# Altium PCB Ventilator.PcbDoc (part 2 of 2)
Units mm, origin at the board's own origin, x right, y up, seen from the top; angles counter-clockwise.
Board outline 121 x 71 mm, 4 copper layers (Top Layer, Int1 (GND), Int2 (PWR), Bottom Layer), stack 1.454 mm thick; 107 components, 73 nets, 431 pads, 141 vias.
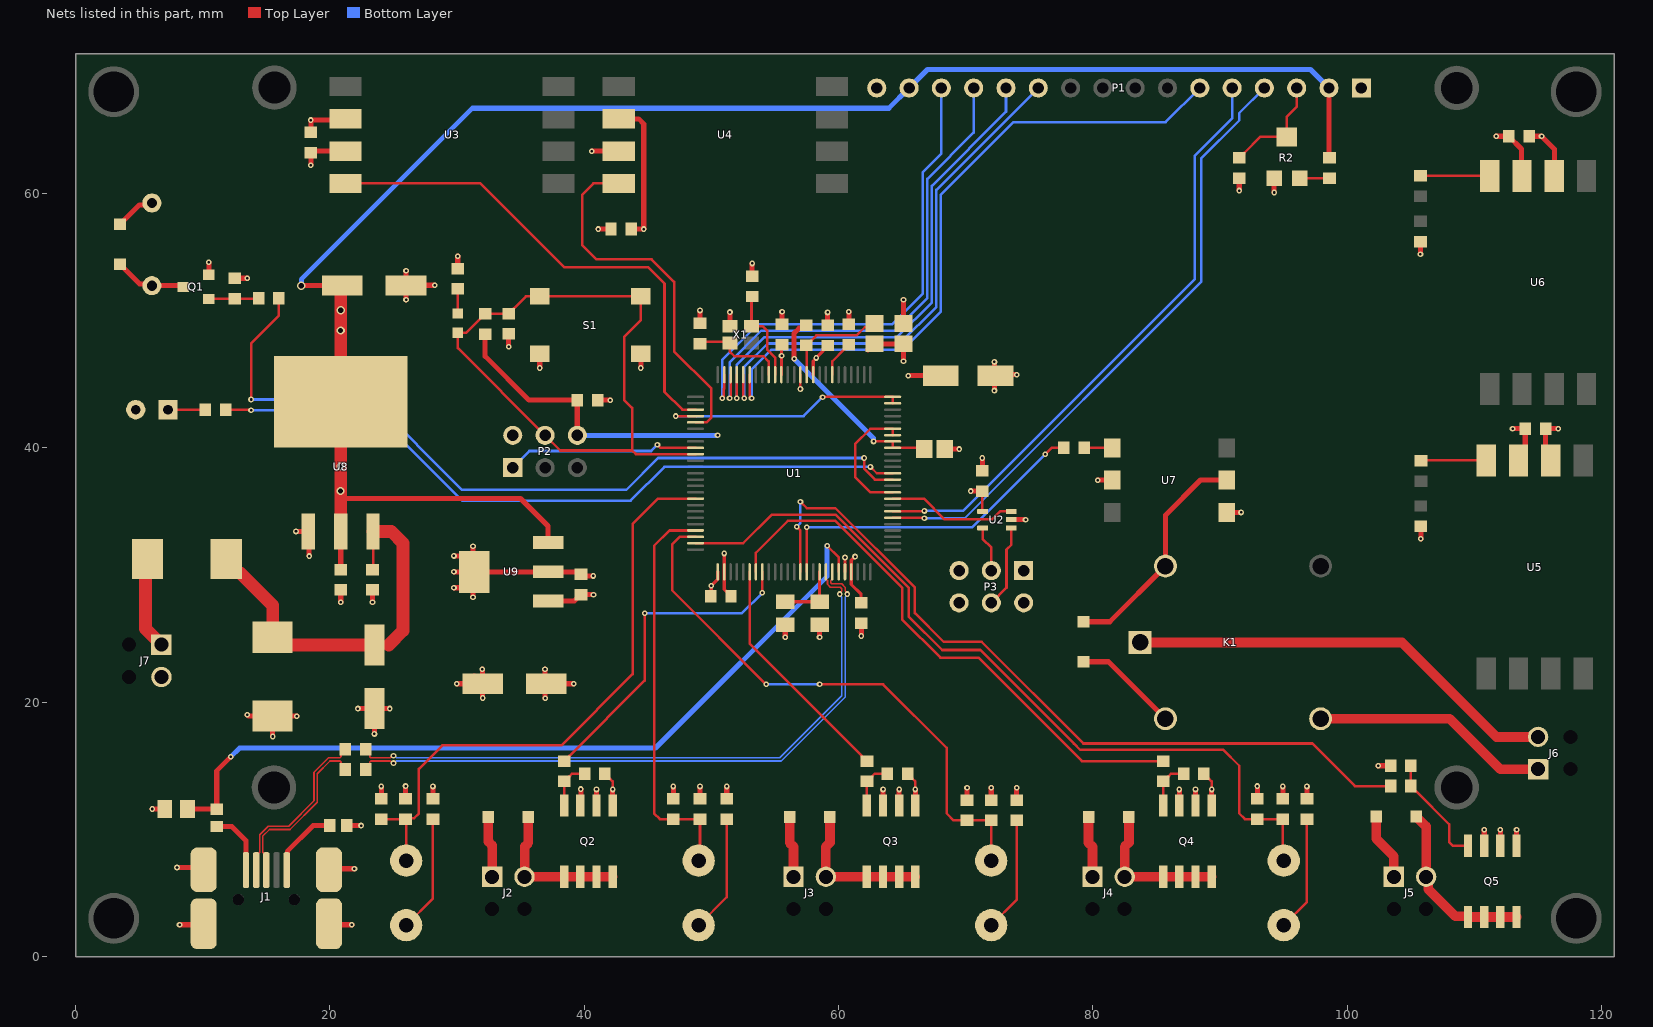
[diagram p4: the nets of this part, all layers, seen from the top]

## Via types
v1: diameter 0.45, hole 0.2, Top Layer to Bottom Layer, 136 vias
v2: diameter 0.66, hole 0.406, Top Layer to Bottom Layer, 5 vias

## Nets (pads, with @x,y where several pads share a name; then routed paths per layer and width w, separated by ;. In a path a pad name is that pad's centre, name@x,y a point inside that pad or via, vN(x,y) a via of type N, cw(c..) or ccw(c..) an arc to the next point about the centre after c; other vN are vias at no path point) (continued)
+3V3: C2.1 C4.1 C9.1 C12.1 C15.1 C25.1 C26.1 D1.2 FB3.1 LS1.1 P3.1 P3.2 R6.2 R10.2 R13.2 R18.2 R27.1 U2.4 U3.2 U4.2 U5.2 U6.2 U9.2 U9.4 | length 60.2
  Top Layer w0.2: C2.1@71.3,36.6 71.3,35.025 U2.4@71.325,35
  Top Layer w0.4: D1.2@3.5,57.575 3.525,57.575 3.775,57.825 3.775,57.85 5.033,59.108 5.858,59.108 LS1.1@6,59.25 ; C4.1@18.5,64.8 v1(18.5,65.775) 21.125,65.775 U3.2@21.22,65.87 ; R6.2@28.1,12.4 v1(28.1,13.375) ; v1(29.75,29) 30.35,29 U9.4@31.25,29.9 ; v1(29.75,30.25) U9.4@31.25,30.25 ; v1(29.75,31.5) 30.35,31.5 U9.4@31.25,30.6 ; v1(29.977,21.445) C26.1@32.008,21.445 ; R27.1@30.051,53.942 R27.1@30.051,54.092 v1(30.051,55.067) ; v1(31.25,28.25) U9.4@31.25,29.9 ; v1(31.25,32.25) U9.4@31.25,30.6 ; C26.1@31.35,22.045 31.928,21.467 C26.1@31.986,21.467 ; U9.4@31.35,30.25 U9.2@37.15,30.25 39.55,30.25 C25.1@39.75,30.05 ; v1(31.986,22.585) C26.1@31.986,21.467 ; v1(32.008,20.326) C26.1@32.008,21.445 ; C25.1@39.752,29.927 v1(40.715,29.927) ; U4.2@42.72,65.87 42.725,65.865 44.275,65.865 44.675,65.465 v1(44.675,57.2) C9.1@43.7,57.2 ; R10.2@51.2,12.25 R10.2@51.2,12.4 v1(51.2,13.375) ; FB3.1@65.103,49.774 v1(65.103,51.641) ; v1(70.4,36.6) C2.1@71.3,36.6 ; R13.2@74,12.15 R13.2@74,12.3 v1(74,13.275) ; R18.2@96.827,12.25 R18.2@96.827,12.4 v1(96.827,13.375) ; C15.1@114.3,64.5 v1(115.275,64.5) 116.3,63.475 116.3,61.41 U6.2@116.27,61.38 ; U5.2@115.952,39.058 115.592,39.418 C12.1@115.592,41.503 v1(116.592,41.503) ; U9.4@31.25,29.9 U9.4@31.25,30.25 ; U9.4@31.25,30.25 U9.4@31.25,30.6 ; C26.1@31.986,21.467 C26.1@32.008,21.445
+5V: C23.1 C24.1 D3.2 D4.2 D5.2 D6.2 J2.1 J3.1 J4.1 J5.1 P1.2 P1.15 R1.1 U8.2 U8.4 U9.3 | length 158
  Top Layer w0.4: v2(17.75,52.75) C24.1@20.849,52.75 ; C23.1@20.849,30.427 U8.2@20.849,33.427 ; 20.849,36.019 34.981,36.019 37.15,33.85 U9.3@37.15,32.55 ; P1.2@98.56,68.295 98.56,62.84 R1.1@98.6,62.8
  Top Layer w0.762: D3.2@32.452,10.97 32.452,9.045 32.757,8.74 J2.1@32.757,6.27 ; D4.2@56.152,10.97 56.152,8.945 56.457,8.64 J3.1@56.457,6.27 ; D5.2@79.652,10.97 79.652,8.945 79.957,8.64 J4.1@79.957,6.27 ; D6.2@102.263,11.001 102.263,9.274 103.657,7.88 J5.1@103.657,6.27
  Top Layer w1: U8.2@20.849,33.427 20.849,36.019 U8.4@20.849,43.627 C24.1@20.849,52.75
  Bottom Layer w0.4: v2(17.75,52.75) 17.75,53.25 31.2,66.7 63.945,66.7 P1.15@65.54,68.295 66.995,69.75 97.105,69.75 P1.2@98.56,68.295
  other v2: 20.835,36.605 20.835,38.537 20.839,49.224 20.851,50.816
+12V: D8.2 K1.2 | length 8.3
  Top Layer w0.4: D8.2@79.25,23.175 81.225,23.175 K1.2@85.7,18.7
AGND: C27.2 FB5.1 U1.17 U1.18 | length 16.8
  Top Layer w0.2: v1(62.75,40.5) U1.18@64.25,40.5 U1.17@64.25,40 FB5.1@66.65,40
  Top Layer w0.4: v1(56.5,47) 56.5,49 56.9,49.4 57.2,49.4 C27.2@57.45,49.65 ; FB5.1@66.65,40 FB5.1@66.75,39.9
  Bottom Layer w0.4: v1(56.5,47) 62.75,40.75 v1(62.75,40.5)
ALARM: R5.1 U1.13 | length 56.7
  Top Layer w0.2: R5.1@11.8,43 13.751,43 v1(13.8,42.951) ; v1(62.5,38.5) 63,38 U1.13@64.25,38
  Bottom Layer w0.2: v1(13.8,42.951) 23.3,42.951 30.4,35.851 43.651,35.851 46.3,38.5 v1(62.5,38.5)
BKGD: P2.1 U1.59 | length 15.2
  Top Layer w0.2: v1(45.75,40.25) 46,40 U1.59@48.75,40
  Bottom Layer w0.2: P2.1@34.376,38.444 35.682,39.75 45.25,39.75 v1(45.75,40.25)
BUTTON1: C5.1 R8.2 SW1.1 U1.67 | length 47.4
  Top Layer w0.2: R8.2@24.046,10.8 C5.1@25.946,10.8 ; SW1.1@26,7.54 26,10.746 C5.1@25.946,10.8 ; U1.67@48.75,36 45.8,36 43.8,34 43.8,22.2 38.2,16.6 28.85,16.6 27,14.75 27,11.25 26.629,10.879 26.025,10.879 C5.1@25.946,10.8
BUTTON2: C8.1 R11.2 SW2.1 U1.72 | length 31.9
  Top Layer w0.2: U1.72@48.75,33.5 46.7,33.5 45.5,32.3 45.5,11.25 45.95,10.8 C8.1@47,10.8 R11.2@49.1,10.8 49.1,7.64 SW2.1@49,7.54
BUTTON3: C10.1 R15.2 SW3.1 U1.73 | length 44.5
  Top Layer w0.2: U1.73@48.75,33 47.5,33 46.9,32.4 46.9,28.8 v1(54.3,21.4) ; v1(58.5,21.4) 63.5,21.4 68.5,16.4 68.5,11.25 69.05,10.7 C10.1@70.1,10.7 R15.2@72,10.7 SW3.1@72,7.54
  Bottom Layer w0.2: v1(54.3,21.4) v1(58.5,21.4)
BUTTON4: C11.1 R20.2 SW4.1 U1.74 | length 63.8
  Top Layer w0.2: U1.74@48.75,32.5 52.5,32.5 54.75,34.75 59.75,34.75 65.5,29 65.5,26.75 68.146,24.104 71.146,24.104 78.5,16.75 79,16.25 90.25,16.25 91.5,15 91.5,11.25 91.95,10.8 C11.1@92.927,10.8 R20.2@94.927,10.8 94.927,7.613 SW4.1@95,7.54
BUZZ: R3.1 U1.12 | length 64.5
  Top Layer w0.2: v1(13.8,43.8) 13.8,48.2 15.992,50.392 R3.1@15.992,51.768 ; v1(62,39.2) 62,38.361 62.861,37.5 63.675,37.5 U1.12@64.25,37.5
  Bottom Layer w0.2: v1(13.8,43.8) 23.3,43.8 30.4,36.7 43.3,36.7 45.8,39.2 v1(62,39.2)
COMPR: R28.1 U1.90 | length 26.3
  Top Layer w0.2: U1.90@57.5,30.25 v1(57.5,33.75) ; v1(76.25,39.5) 76.75,40 R28.1@77.7,40
  Bottom Layer w0.2: v1(57.5,33.75) 70.5,33.75 v1(76.25,39.5)
DB4: P1.11 U1.46 | length 41.9
  Top Layer w0.2: U1.46@52.5,45.75 52.5,43.971 v1(52.577,43.894)
  Bottom Layer w0.2: v1(52.577,43.894) 52.577,46.354 54.427,48.204 64.803,48.204 67.688,51.088 67.688,60.283 P1.11@75.7,68.295
DB5: P1.12 U1.47 | length 41.1
  Top Layer w0.2: v1(52,43.894) U1.47@52,45.75
  Bottom Layer w0.2: v1(52,43.894) 52,46.539 54.165,48.704 64.596,48.704 67.334,51.442 67.334,60.603 73.16,66.429 P1.12@73.16,68.295
DB6: P1.13 U1.48 | length 40.4
  Top Layer w0.2: v1(51.423,43.894) 51.5,43.971 U1.48@51.5,45.75
  Bottom Layer w0.2: v1(51.423,43.894) 51.423,46.724 53.903,49.204 64.389,49.204 66.981,51.795 66.981,61.139 70.62,64.778 P1.13@70.62,68.295
DB7: P1.14 U1.49 | length 39.6
  Top Layer w0.2: v1(50.846,43.894) 50.971,44.019 50.971,44.627 51,44.656 U1.49@51,45.75
  Bottom Layer w0.2: v1(50.846,43.894) 50.846,46.909 53.641,49.704 64.182,49.704 66.627,52.149 66.627,61.674 68.08,63.127 P1.14@68.08,68.295
DPS: U1.10 U1.19 U1.20 | length 10
  Top Layer w0.2: U1.10@64.25,36.5 63.675,36.5 62.5,36.5 61.3,37.7 61.3,40.3 62.5,41.5 U1.20@64.25,41.5 U1.19@64.25,41
DPS2: U1.24 U1.25 U1.54 | length 19.7
  Top Layer w0.2: v1(47.196,42.497) 47.199,42.5 U1.54@48.75,42.5 ; v1(58.735,43.985) 58.771,44.021 63.654,44.021 63.675,44 U1.25@64.25,44 U1.24@64.25,43.5
  Bottom Layer w0.2: v1(47.196,42.497) 57.247,42.497 v1(58.735,43.985)
E: P1.6 U1.45 | length 54
  Top Layer w0.2: U1.45@53,45.75 53,44.656 53.029,44.627 53.029,44.019 v1(53.154,43.894)
  Bottom Layer w0.2: v1(53.154,43.894) 53.154,46.169 54.689,47.704 65.01,47.704 68.041,50.735 68.041,59.913 73.739,65.611 85.716,65.611 P1.6@88.4,68.295
GAS1: R12.1 U1.81 | length 18.7
  Top Layer w0.2: U1.81@53,30.25 53,24.597 61.827,15.77 61.827,15.72 62.177,15.37 R12.1@62.227,15.37
GAS2: R17.1 U1.82 | length 43.8
  Top Layer w0.2: U1.82@53.5,30.25 53.5,31.75 56,34.25 59.75,34.25 65,29 65,26.5 68,23.5 71,23.5 79.13,15.37 R17.1@85.527,15.37
GND: C1.2 C2.2 C3.2 C4.2 C5.2 C6.2 C7.2 C8.2 C9.2 C10.2 C11.2 C12.2 C13.2 C14.2 C15.2 C16.2 C17.2 C18.2 C19.2 C20.2 C21.2 C22.2 C23.2 C24.2 C25.2 C26.2 C28.1 C29.1 C30.1 D2.2 D10.1 FB2.2 FB5.2 J1.6 J1.7 J1.8 J1.9 J7.2 P1.1 P1.16 P2.2 P3.5 P3.6 Q1.2 Q2.1 Q2.2 Q2.3 Q3.1 Q3.2 Q3.3 Q4.1 Q4.2 Q4.3 Q5.1 Q5.2 Q5.3 R2.1 R4.2 R8.1 R9.2 R11.1 R14.2 R15.1 R19.2 R20.1 R21.1 R24.2 R25.1 S1.1 S1.2 U1.37 U1.76 U1.96 U2.2 U3.3 U4.3 U5.3 U6.3 U7.2 U7.4 U8.1 U9.1 X1.2 | length 115.9
  Top Layer w0.2: R9.2@41.627,14.37 41.627,14.32 41.977,13.97 42.027,13.97 42.232,13.765 v1(42.232,13.135) ; v1(57,44.625) U1.37@57,45.75 ; U1.96@60.5,30.25 v1(60.5,31.375) ; R14.2@65.427,14.37 65.427,14.32 65.777,13.97 65.827,13.97 66.032,13.765 v1(66.032,13.135) ; R19.2@88.727,14.37 88.727,14.32 89.077,13.97 89.127,13.97 89.332,13.765 v1(89.332,13.135)
  Top Layer w0.254: C17.2@49.936,28.329 49.99,28.383 v1(49.99,29.162) 50.5,29.672 U1.76@50.5,30.25
  Top Layer w0.4: v1(6.025,11.6) C30.1@7,11.6 ; v1(7.975,7) J1.6@10.075,7 ; v1(8.175,2.5) J1.7@10.075,2.5 ; Q1.2@10.477,53.607 v1(10.477,54.582) ; R4.2@12.525,53.33 v1(13.5,53.33) ; v1(13.5,19) 13.514,19 13.614,18.9 D10.1@15.5,18.9 ; v1(15.5,17.3) D10.1@15.5,18.9 ; v1(17.334,33.427) U8.1@18.309,33.427 ; v1(17.4,18.9) D10.1@15.5,18.9 ; v1(18.367,31.489) U8.1@18.367,33.427 ; v1(18.5,62.225) C4.2@18.5,63.2 18.63,63.33 U3.3@21.22,63.33 ; J1.9@19.925,2.5 v1(21.725,2.5) ; J1.8@20.2,6.9 v1(21.925,6.9) ; v1(20.849,27.852) C23.2@20.849,28.827 ; FB2.2@21.325,10.3 v1(22.45,10.3) ; v1(22.2,19.5) C21.2@23.5,19.5 ; v1(23.349,27.852) C22.2@23.349,28.827 ; v1(23.5,17.5) C21.2@23.5,19.5 ; R8.1@24.046,12.4 v1(24.046,13.375) ; v1(24.7,19.5) C21.2@23.5,19.5 ; C5.2@25.946,12.275 v1(25.946,13.4) ; C24.2@25.98,52.758 25.987,52.751 v1(25.987,51.641) ; v1(25.987,53.927) 25.987,52.791 25.98,52.784 v1(28.232,52.784) ; v1(34.057,47.954) C16.2@34.057,48.954 C16.2@34.057,49.079 ; v1(36.499,46.277) S1.2@36.499,47.402 ; v1(36.913,22.593) 36.913,21.54 C26.2@37.008,21.445 ; v1(36.921,20.302) 36.921,21.358 C26.2@37.008,21.445 ; U9.1@37.15,27.95 39.216,27.95 39.45,28.184 39.45,28.2 39.7,28.45 C25.2@39.75,28.45 v1(40.725,28.45) ; v1(39.166,21.445) C26.2@37.008,21.445 ; Q2.3@39.692,11.87 39.727,11.905 v1(39.727,13.17) ; v1(40.592,63.325) 40.597,63.33 U4.3@42.72,63.33 ; Q2.2@40.962,11.87 v1(40.962,13.135) ; C3.2@41.05,43.75 v1(42.05,43.75) ; v1(41.1,57.2) C9.2@42.1,57.2 C9.2@42.225,57.2 ; Q2.1@42.232,11.87 v1(42.232,13.135) ; v1(44.449,46.277) S1.1@44.449,47.402 ; C8.2@47,12.4 v1(47,13.375) ; R11.1@49.1,12.4 v1(49.1,13.375) ; C13.2@49.1,49.675 C13.2@49.1,49.8 v1(49.1,50.8) ; X1.2@51.45,49.55 v1(51.45,50.675) ; C14.2@53.2,53.375 C14.2@53.2,53.5 v1(53.2,54.5) ; C19.2@55.55,49.575 C19.2@55.55,49.7 v1(55.55,50.7) ; v1(55.8,25.1) C28.1@55.8,26.1 ; v1(58.5,25.1) C29.1@58.5,26.1 ; C6.2@59.134,49.647 v1(59.134,50.647) ; C7.2@60.8,49.575 C7.2@60.8,49.7 v1(60.8,50.7) ; v1(61.789,25.203) C18.2@61.789,26.203 C18.2@61.789,26.328 ; Q3.3@63.492,11.87 v1(63.492,13.135) ; Q3.2@64.762,11.87 v1(64.762,13.135) ; Q3.1@66.032,11.87 v1(66.032,13.135) ; FB5.2@68.35,39.9 v1(69.475,39.9) ; C10.2@70.1,12.3 v1(70.1,13.275) ; C2.2@71.3,38.2 v1(71.3,39.2) ; R15.1@72,12.3 v1(72,13.275) ; v1(72.25,44.5) 72.25,45.589 C20.2@72.333,45.672 ; v1(72.25,46.75) 72.25,45.627 C20.2@72.28,45.598 ; C20.2@72.333,45.75 v1(74,45.75) ; U2.2@73.575,34.35 v1(74.7,34.35) ; v1(80.375,37.46) U7.2@81.5,37.46 ; Q4.3@86.792,11.87 v1(86.792,13.135) ; Q4.2@88.062,11.87 v1(88.062,13.135) ; Q4.1@89.332,11.87 v1(89.332,13.135) ; U7.4@90.52,34.92 v1(91.645,34.92) ; v1(91.5,60.225) C1.2@91.5,61.2 ; C11.2@92.927,12.398 v1(92.927,13.4) ; v1(94.25,60.075) R2.1@94.25,61.2 ; R20.1@94.927,12.25 R20.1@94.927,12.4 v1(94.927,13.375) ; v1(102.425,15) R24.2@103.4,15 ; v1(105.75,55.225) R25.1@105.75,56.2 R25.1@105.75,56.35 ; v1(105.783,32.852) R21.1@105.783,33.827 R21.1@105.783,33.977 ; Q5.3@110.765,8.7 v1(110.765,9.965) ; v1(111.7,64.5) C15.2@112.7,64.5 ; Q5.2@112.035,8.7 v1(112.035,9.965) ; C15.2@112.825,64.5 C15.2@112.7,64.5 ; v1(112.992,41.503) C12.2@113.992,41.503 113.992,39.762 U5.3@113.35,39.12 ; Q5.1@113.305,8.7 v1(113.305,9.965) ; U6.3@113.73,61.38 113.7,61.41 113.7,63.5 C15.2@112.7,64.5
MCU3V3: C3.1 C6.1 C17.1 C18.1 C19.1 C20.1 FB3.2 FB4.2 P2.6 R26.2 U1.35 U1.40 U1.77 U1.97 | length 43.5
  Top Layer w0.254: v1@51.006,31.702 v1(51,31.696) U1.77@51,30.25 51,28.865 51.163,28.702 51.213,28.702 51.536,28.379 C17.1@51.536,28.329 ; U1.40@55.5,45.75 55.5,48.05 C19.1@55.55,48.1 ; U1.35@58,45.75 58,46.824 v1(58.245,47.069) 58.761,47.585 58.761,47.724 59.084,48.047 C6.1@59.134,48.047 ; v1(61.293,31.448) 61,31.155 U1.97@61,30.25 61,29.25 61.765,28.485 61.765,27.827 C18.1@61.789,27.803 ; C18.1@61.918,27.932 C18.1@62.05,27.8
  Top Layer w0.4: R26.2@32.21,48.936 32.21,47.196 35.656,43.75 C3.1@39.45,43.75 39.45,40.99 P2.6@39.456,40.984 ; FB4.2@62.317,47.684 FB4.2@62.317,47.724 ; FB4.2@62.817,48.174 FB3.2@65.103,48.174 v1(65.103,46.815) ; v1(65.484,45.672) C20.1@68.033,45.672
  Bottom Layer w0.4: P2.6@39.456,40.984 v1(50.484,40.984)
  other v1: 55.514,47.232
MCU_RESET: C16.1 D7.2 P2.4 R26.1 S1.3 S1.4 U1.60 | length 52
  Top Layer w0.2: C16.1@34.057,50.554 34.107,50.554 34.457,50.904 34.457,50.954 35.405,51.902 S1.4@36.499,51.902 S1.3@44.449,51.902 44.449,50.037 43.132,48.72 43.132,43.767 43.767,43.132 43.767,39.79 ; C16.1@34.107,50.551 32.225,50.551 R26.1@32.21,50.536 32.16,50.536 31.81,50.186 31.81,50.136 30.728,49.054 D7.2@30.057,49.054 30.057,47.843 P2.4@36.916,40.984 38.11,39.79 43.767,39.79 ; U1.60@48.75,39.5 44.057,39.5 43.767,39.79
NetC7_1: C7.1 U1.32 | length 2.9
  Top Layer w0.2: U1.32@59.5,45.75 59.5,46.8 C7.1@60.427,47.727
  Top Layer w0.254: C7.1@60.427,47.727 60.427,47.777 60.75,48.1 C7.1@60.8,48.1
NetC13_1: C13.1 U1.42 X1.3 | length 7.5
  Top Layer w0.2: C13.1@49.1,48.325 51.375,48.325 X1.3@51.45,48.25 51.45,47.55 51.8,47.2 54.1,47.2 54.5,46.8 54.5,46.325 U1.42@54.5,45.75
NetC14_1: C14.1 U1.41 X1.1 | length 7.6
  Top Layer w0.2: C14.1@53.2,52.025 53.15,51.975 X1.1@53.15,49.55 54.05,49.55 54.4,49.2 54.4,47.7 55,47.1 U1.41@55,45.75
NetC21_1: C21.1 C22.1 D9.2 D10.2 U8.3 | length 31.1
  Top Layer w0.2: C22.1@23.349,30.427 23.389,30.467 U8.3@23.389,33.427
  Top Layer w1: D9.2@11.85,31.25 11.85,30.9 12.575,30.175 12.925,30.175 15.5,27.6 D10.2@15.5,25.1 D10.2@16.1,24.5 ; D10.2@15.575,25.175 16.25,24.5 C21.1@23.5,24.5 ; U8.3@23.389,33.427 23.394,33.422 24.828,33.422 25.75,32.5 25.75,25.625 24.625,24.5
NetC27_1: C27.1 FB4.1 U1.36 | length 8.4
  Top Layer w0.2: U1.36@57.5,45.75 57.5,48 C27.1@57.45,48.05 57.5,48.05 57.85,48.4 57.85,48.45 58.247,48.847 61.42,48.847 62.055,49.482 62.525,49.482 FB4.1@62.817,49.774
NetD1_1: D1.1 LS1.2 Q1.3 | length 5.7
  Top Layer w0.4: D1.1@3.5,54.425 3.525,54.425 3.775,54.175 3.775,54.15 5.033,52.892 5.858,52.892 LS1.2@6,52.75 8.384,52.75 Q1.3@8.477,52.657
NetD2_1: D2.1 R5.2 | length 2.9
  Top Layer w0.2: D2.1@7.27,43 R5.2@10.2,43
NetD3_1: D3.1 J2.2 Q2.5 Q2.6 Q2.7 Q2.8 | length 11.8
  Top Layer w0.762: D3.1@35.602,10.97 35.602,8.945 35.327,8.67 35.327,6.3 J2.2@35.297,6.27 Q2.5@38.422,6.27 Q2.6@39.692,6.27 Q2.7@40.962,6.27 Q2.8@42.232,6.27
NetD4_1: D4.1 J3.2 Q3.5 Q3.6 Q3.7 Q3.8 | length 11.9
  Top Layer w0.762: D4.1@59.302,10.97 59.327,10.945 59.327,8.97 58.997,8.64 J3.2@58.997,6.27 Q3.5@62.222,6.27 Q3.6@63.492,6.27 Q3.7@64.762,6.27 Q3.8@66.032,6.27
NetD5_1: D5.1 J4.2 Q4.5 Q4.6 Q4.7 Q4.8 | length 11.6
  Top Layer w0.762: D5.1@82.827,10.945 82.827,8.97 82.497,8.64 J4.2@82.497,6.27 Q4.5@85.522,6.27 Q4.6@86.792,6.27 Q4.7@88.062,6.27 Q4.8@89.332,6.27
NetD6_1: D6.1 J5.2 Q5.5 Q5.6 Q5.7 Q5.8 | length 13.9
  Top Layer w0.762: D6.1@105.413,11.001 106.197,10.217 J5.2@106.197,6.27
  Top Layer w0.768: J5.2@106.197,6.27 106.356,6.111 106.356,5.308 108.505,3.159 109.436,3.159 Q5.5@109.495,3.1 Q5.6@110.765,3.1 Q5.7@112.035,3.1 Q5.8@113.305,3.1
NetD7_1: D7.1 R27.2 | length 1.9
  Top Layer w0.2: R27.2@30.051,52.492 30.057,52.486 D7.1@30.057,50.554
NetD8_1: D8.1 K1.5 U7.5 | length 18.2
  Top Layer w0.4: D8.1@79.25,26.325 81.325,26.325 K1.5@85.7,30.7 85.7,34.7 88.46,37.46 U7.5@90.52,37.46
NetD9_1: D9.1 J7.1 | length 7.3
  Top Layer w1: D9.1@5.65,31.25 5.5,31.1 5.5,25.77 J7.1@6.75,24.52
NetFB1_1: FB1.1 J1.1 | length 5.1
  Top Layer w0.4: FB1.1@11.1,10.225 12.285,10.225 13.4,9.11 J1.1@13.4,6.8
NetFB2_1: FB2.1 J1.5 | length 5.7
  Top Layer w0.4: J1.5@16.6,6.8 16.65,6.85 16.65,8.268 18.682,10.3 FB2.1@19.975,10.3
NetJ6_1: J6.1 K1.3 | length 18.7
  Top Layer w0.768: K1.3@97.9,18.7 108.05,18.7 112.02,14.73 J6.1@115,14.73
NetJ6_2: J6.2 K1.1 | length 34.4
  Top Layer w0.768: K1.1@83.7,24.7 104.3,24.7 111.73,17.27 J6.2@115,17.27
NetP3_3: P3.3 U2.5 | length 3.6
  Top Layer w0.2: U2.5@71.325,33.7 71.325,32.845 72.01,32.16 P3.3@72.01,30.35
NetP3_4: P3.4 U2.1 | length 6.5
  Top Layer w0.2: P3.4@72.01,27.81 73.2,29 73.2,32 73.575,32.375 U2.1@73.575,33.7
NetQ1_1: Q1.1 R3.2 R4.1 | length 3.9
  Top Layer w0.2: Q1.1@10.477,51.707 14.331,51.707 R3.2@14.392,51.768
NetQ2_4: Q2.4 R7.2 R9.1 | length 3.8
  Top Layer w0.2: Q2.4@38.422,11.87 38.422,13.765 R7.2@38.427,13.77 38.477,13.77 38.827,14.12 38.827,14.17 39.027,14.37 R9.1@40.027,14.37
NetQ3_4: Q3.4 R12.2 R14.1 | length 3.8
  Top Layer w0.2: Q3.4@62.222,11.87 62.222,13.765 R12.2@62.227,13.77 62.277,13.77 62.627,14.12 62.627,14.17 62.827,14.37 R14.1@63.827,14.37
NetQ4_4: Q4.4 R17.2 R19.1 | length 3.8
  Top Layer w0.2: Q4.4@85.522,11.87 85.522,13.765 R17.2@85.527,13.77 85.577,13.77 85.927,14.12 85.927,14.17 86.127,14.37 R19.1@87.127,14.37
NetQ5_4: Q5.4 R22.2 R24.1 | length 8.9
  Top Layer w0.2: R24.1@105,15 R22.2@105,13.4 105,13.35 105.35,13 105.4,13 108,10.4 108,9 108.3,8.7 Q5.4@109.495,8.7
NetR1_2: R1.2 R2.3 | length 2.3
  Top Layer w0.2: R2.3@96.25,61.2 R1.2@98.6,61.2
NetR6_1: R6.1 SW1.2 | length 9.2
  Top Layer w0.2: SW1.2@26,2.46 28.1,4.56 R6.1@28.1,10.8
NetR10_1: R10.1 SW2.2 | length 9.3
  Top Layer w0.2: SW2.2@49,2.46 51.2,4.66 R10.1@51.2,10.8
NetR13_1: R13.1 SW3.2 | length 9.1
  Top Layer w0.2: SW3.2@72,2.46 74,4.46 R13.1@74,10.7
NetR16_2: R16.2 U5.4 | length 5.2
  Top Layer w0.2: R16.2@105.792,38.974 R16.2@105.825,39.007 ; R16.2@105.8,39.007 R16.2@105.825,39.007 ; U5.4@110.923,39.007 R16.2@105.825,39.007
NetR18_1: R18.1 SW4.2 | length 9.1
  Top Layer w0.2: SW4.2@95,2.46 96.827,4.287 R18.1@96.827,10.8
NetR23_2: R23.2 U6.4 | length 5.5
  Top Layer w0.2: R23.2@105.7,61.38 R23.2@105.763,61.38 ; R23.2@105.759,61.376 R23.2@105.763,61.38 ; U6.4@111.19,61.38 R23.2@105.763,61.38
NetR28_2: R28.2 U7.1 | length 2.2
  Top Layer w0.2: R28.2@79.3,40 U7.1@81.5,40
OUTPUT: R7.1 U1.83 | length 25.8
  Top Layer w0.2: R7.1@38.427,15.37 38.477,15.37 38.827,15.72 38.827,15.77 44.75,21.693 v1(44.75,27) ; v1(54,28.6) U1.83@54,30.25
  Bottom Layer w0.2: v1(44.75,27) 52.4,27 v1(54,28.6)
P1S: U1.53 U3.4 | length 39.9
  Top Layer w0.2: U3.4@21.22,60.79 31.824,60.79 38.433,54.181 45.037,54.181 46.307,52.911 46.307,44.402 47.709,43 U1.53@48.75,43
P2S: U1.55 U4.4 | length 28.9
  Top Layer w0.2: U4.4@42.72,60.79 40.724,60.79 39.83,59.896 39.83,55.959 40.973,54.816 45.291,54.816 47.069,53.038 47.069,47.577 49.99,44.656 49.99,42.37 49.62,42 U1.55@48.75,42
R/W: P1.5 U1.7 | length 47.6
  Top Layer w0.2: U1.7@64.25,35 65.025,35 66.711,35 v1(66.75,35.039)
  Bottom Layer w0.2: v1(66.75,35.039) 69.789,35.039 88,53.25 88,62.957 90.94,65.897 P1.5@90.94,68.295
RESIDUAL: R22.1 U1.89 | length 62.6
  Top Layer w0.2: v1(56.7,33.8) 57,33.5 U1.89@57,30.25 ; v1(57,35.75) 57.5,35.25 59.75,35.25 66,29 66,27 68.25,24.75 71.25,24.75 79.25,16.75 97.25,16.75 100.6,13.4 R22.1@103.4,13.4
  Bottom Layer w0.2: v1(56.7,33.8) 57,34.1 v1(57,35.75)
RS: P1.4 U1.6 | length 49.3
  Top Layer w0.2: U1.6@64.25,34.5 65.025,34.5 66.711,34.5 v1(66.75,34.462)
  Bottom Layer w0.2: v1(66.75,34.462) 69.919,34.462 88.5,53.043 88.5,62.75 91.5,65.75 91.5,66.315 P1.4@93.48,68.295
TEMP: U1.9 U2.3 | length 10.3
  Top Layer w0.2: U1.9@64.25,36 66.7,36 68.331,34.369 72.069,34.369 72.7,35 U2.3@73.575,35
USB_ID_N: R29.2 U1.93 | length 50.9
  Top Layer w0.131: R29.2@22.8,16.3 23.133,15.967 23.133,15.706 23.21,15.629 23.646,15.629 24.754,15.629 24.914,15.789 v1(25,15.789) ; U1.93@59,30.25 59,29.685 59.121,29.564 59.121,29.276 59.349,29.048 60.133,29.048 60.25,28.931 60.25,28.736 60.09,28.577 v1(60.09,28.5)
  Bottom Layer w0.131: v1(25,15.789) 25.077,15.789 25.236,15.629 55.379,15.629 60.25,20.5 60.25,28.254 60.09,28.414 v1(60.09,28.5)
USB_ID_P: R30.2 U1.94 | length 51.3
  Top Layer w0.131: R30.2@22.8,14.7 23.133,15.033 23.133,15.294 23.21,15.371 23.753,15.371 24.754,15.371 24.914,15.211 v1(25,15.211) ; U1.94@59.5,30.25 59.5,29.685 59.379,29.564 59.379,29.383 59.456,29.306 60.239,29.306 60.508,29.038 60.508,28.736 60.667,28.577 v1(60.667,28.5)
  Bottom Layer w0.131: v1(25,15.211) 25.077,15.211 25.236,15.371 55.486,15.371 60.508,20.393 60.508,28.254 60.667,28.414 v1(60.667,28.5)
USB_N: J1.2 R29.1 | length 13.9
  Top Layer w0.131: J1.2@14.2,6.8 14.2,7.94 14.471,8.211 14.471,9.578 15.143,10.25 16.75,10.25 18.742,12.242 18.742,14.478 19.893,15.629 20.649,15.629 20.79,15.629 20.867,15.706 20.867,15.967 R29.1@21.2,16.3
USB_P: J1.3 R30.1 | length 13.4
  Top Layer w0.131: J1.3@15,6.8 15,7.94 14.729,8.211 14.729,9.471 15.25,9.992 16.857,9.992 19,12.135 19,14.371 20,15.371 20.542,15.371 20.79,15.371 20.867,15.294 20.867,15.033 R30.1@21.2,14.7
V_USB_BUS: C30.2 FB1.2 U1.95 | length 64.5
  Top Layer w0.2: v1(59.1,32.3) 60,31.4 U1.95@60,30.25
  Top Layer w0.4: C30.2@8.8,11.6 11.075,11.6 FB1.2@11.1,11.575 11.1,14.6 v1(12.2,15.7)
  Bottom Layer w0.4: v1(12.2,15.7) 12.9,16.4 45.6,16.4 59.1,29.9 v1(59.1,32.3)
VO: C1.1 P1.3 R2.2 | length 8.6
  Top Layer w0.2: C1.1@91.5,62.8 91.55,62.8 91.9,63.15 91.9,63.2 93.15,64.45 R2.2@95.25,64.45 95.25,66.04 96.02,66.81 P1.3@96.02,68.295
VUSB33: C28.2 C29.2 U1.92 | length 5
  Top Layer w0.254: C28.2@55.8,27.9 C29.2@58.5,27.9 U1.92@58.5,30.25
pads on no net: J1.4 J1.X J1.Y J2.MH1 J2.MH2 J3.MH1 J3.MH2 J4.MH1 J4.MH2 J5.MH1 J5.MH2 J6.MH1 J6.MH2 J7.MH1 J7.MH2 K1.4 P1.7 P1.8 P1.9 P1.10 P2.3 P2.5 U1.1 U1.2 U1.3 U1.4 U1.5 U1.8 U1.15 U1.16 U1.21 U1.22 U1.23 U1.26 U1.27 U1.28 U1.29 U1.30 U1.31 U1.33 U1.34 U1.38 U1.39 U1.43 U1.44 U1.50 U1.51 U1.52 U1.56 U1.57 U1.58 U1.61 U1.62 U1.63 U1.64 U1.65 U1.66 U1.68 U1.69 U1.70 U1.71 U1.75 U1.78 U1.79 U1.80 U1.84 U1.85 U1.86 U1.87 U1.88 U1.91 U1.98 U1.99 U1.100 U3.1 U3.5 U3.6 U3.7 U3.8 U4.1 U4.5 U4.6 U4.7 U4.8 U5.1 U5.5 U5.6 U5.7 U5.8 U6.1 U6.5 U6.6 U6.7 U6.8 U7.3 U7.6 X1.4

## Polygon pours and split planes (outlines as drawn)
GND on Int1 (GND) (split plane): 120.49,0.51 0.51,0.51 0.51,70.49 120.49,70.49
MCU3V3 on Int2 (PWR) (split plane): 65.917,30.761 48.033,30.761 48.033,48.01 65.917,48.01
+5V on Int2 (PWR) (split plane): 18.9,55.555 18.952,55.548 24.048,55.548 24.048,36.702 10.5,36.702 10.448,36.695 10.399,36.675 10.357,36.643 10.325,36.601 10.305,36.552 10.298,36.5 10.298,9.25 10.305,9.198 10.325,9.149 10.357,9.107 10.399,9.075 10.448,9.055 10.5,9.048 104.798,9.048 104.798,0.51 0.51,0.51 0.51,55.548 18.75,55.548 18.802,55.555 18.851,55.575
+3V3 on Int2 (PWR) (split plane): 120.49,0.51 105.202,0.51 105.202,9.25 105.195,9.302 105.175,9.351 105.143,9.393 105.101,9.425 105.052,9.445 105,9.452 10.702,9.452 10.702,36.298 24.25,36.298 24.302,36.305 24.351,36.325 24.393,36.357 24.425,36.399 24.445,36.448 24.452,36.5 24.452,55.75 24.445,55.802 24.425,55.851 24.393,55.893 24.351,55.925 24.302,55.945 24.25,55.952 18.952,55.952 18.9,55.945 18.851,55.925 18.802,55.945 18.75,55.952 0.51,55.952 0.51,70.49 120.49,70.49

## Keep-outs
Keep-Out Layer:
  circle w0.127: c118,68 r2.794
  circle w0.127: c3,68 r2.794
  circle w0.127: c3,3 r2.794
  circle w0.127: c118,3 r2.794
  circle w0.127: c108.6,13.295 r2.159
  circle w0.127: c15.6,13.295 r2.159
  circle w0.127: c15.64,68.326 r2.159
  circle w0.127: c108.6,68.295 r2.159

## Other copper
Int2 (PWR) (plane layer: these items are gaps in the copper):
  lines w0.4: 0,55.75 18.75,55.75 ; 18.952,55.75 24.25,55.75 24.25,36.5 10.5,36.5 10.5,9.25 30.5,9.25 84.75,9.25 ; 84.25,9.25 105,9.25 105,0 ; 47.831,30.559 66.119,30.559 66.119,48.212 57.229,48.212 47.831,48.212 47.831,30.559

## Silkscreen, mask and mechanical layers (free items; w line width, h text height)
Top Overlay:
  text "CONTRAST" at 91.824,57.915 h1.02
  text "TANK PRESSURE" at 24.178,56.678 h1.02
  text "LUNG PRESSURE" at 48.178,56.678 h1.02
  text "RESET" at 38.724,53.615 h1.02
  text "LUNGS FLOW" at 107.822,47.778 h1.02 r90
  text "BDM" at 35.778,35.278 h1.02
  text "TANK FLOW" at 107.822,25.878 h1.02 r90
  text "+PWR-" at 1.428,25.572 h1.02 r270
  text "T GAIN" at 69.278,24.778 h1.02
  text "COMPR" at 120.072,13.428 h1.02 r90
  text "+OUTPUT-" at 30.678,1.178 h1.02
  text "+GAS1-" at 55.428,1.178 h1.02
  text "+GAS2-" at 78.428,1.178 h1.02
  text "+RESIDUAL-" at 100.428,1.178 h1.02
Bottom Overlay:
  text "DOWN" at 29.278,2.578 h1.02 r270
  text "UP" at 52.278,2.378 h1.02 r270
  text "START" at 98.178,2.278 h1.02 r270
  text "SELECT" at 75.178,2.178 h1.02 r270
Board Outline:
  drawing of 299 lines, arcs and shapes, not listed
  text "Layer" at 1.19,114.098 h1.52
  text "Name" at 11.602,114.098 h1.52
  text "Material" at 35.218,114.098 h1.52
  text "Thickness" at 50.454,114.098 h1.52
  text "Constant" at 66.96,114.098 h1.52
  text "Board Layer Stack" at 81.434,114.098 h1.52
  text "Top Overlay" at 11.602,111.05 h1.52
  text "Top Solder" at 11.602,108.002 h1.52
  text "SM-001" at 35.218,108.002 h1.52
  text "1.00mil" at 50.454,108.002 h1.52
  text "4" at 66.96,108.002 h1.52
  text "1" at 1.19,104.954 h1.52
  text "Top Layer" at 11.602,104.954 h1.52
  text "Copper" at 35.218,104.954 h1.52
  text "0.67mil" at 50.454,104.954 h1.52
  text "Dielectric 1" at 11.602,101.906 h1.52
  text "PP-017" at 35.218,101.906 h1.52
  text "4.33mil" at 50.454,101.906 h1.52
  text "4.29" at 66.96,101.906 h1.52
  text "2" at 1.19,98.858 h1.52
  text "Int1 (GND)" at 11.602,98.858 h1.52
  text "Copper" at 35.218,98.858 h1.52
  text "1.38mil" at 50.454,98.858 h1.52
  text "Dielectric 3" at 11.602,95.81 h1.52
  text "Core-039" at 35.218,95.81 h1.52
  text "44.49mil" at 50.454,95.81 h1.52
  text "3.96" at 66.96,95.81 h1.52
  text "3" at 1.19,92.762 h1.52
  text "Int2 (PWR)" at 11.602,92.762 h1.52
  text "Copper" at 35.218,92.762 h1.52
  text "1.38mil" at 50.454,92.762 h1.52
  text "Dielectric 5" at 11.602,89.714 h1.52
  text "PP-017" at 35.218,89.714 h1.52
  text "4.33mil" at 50.454,89.714 h1.52
  text "4.29" at 66.96,89.714 h1.52
  text "4" at 1.19,86.666 h1.52
  text "Bottom Layer" at 11.602,86.666 h1.52
  text "Copper" at 35.218,86.666 h1.52
  text "0.67mil" at 50.454,86.666 h1.52
  text "Bottom Solder" at 11.602,83.618 h1.52
  text "SM-001" at 35.218,83.618 h1.52
  text "1.00mil" at 50.454,83.618 h1.52
  text "4" at 66.96,83.618 h1.52
  text "Bottom Overlay" at 11.602,80.57 h1.52

## Text inside footprints (layer, text, board x,y; h text height)
LS1: Bottom Overlay "+" at 5.15,62.4 h1.5 r270
P2: Top Overlay "5" at 40.98,37.936 h1.27; Top Overlay "1" at 32.344,37.936 h1.27
P3: Top Overlay "6" at 67.946,28.318 h1.27 r180; Top Overlay "5" at 67.946,30.858 h1.27 r180; Top Overlay "2" at 77.09,28.318 h1.27 r180; Top Overlay "1" at 76.582,30.858 h1.27 r180